# EAGLE board controller (EAGLE 6.2)
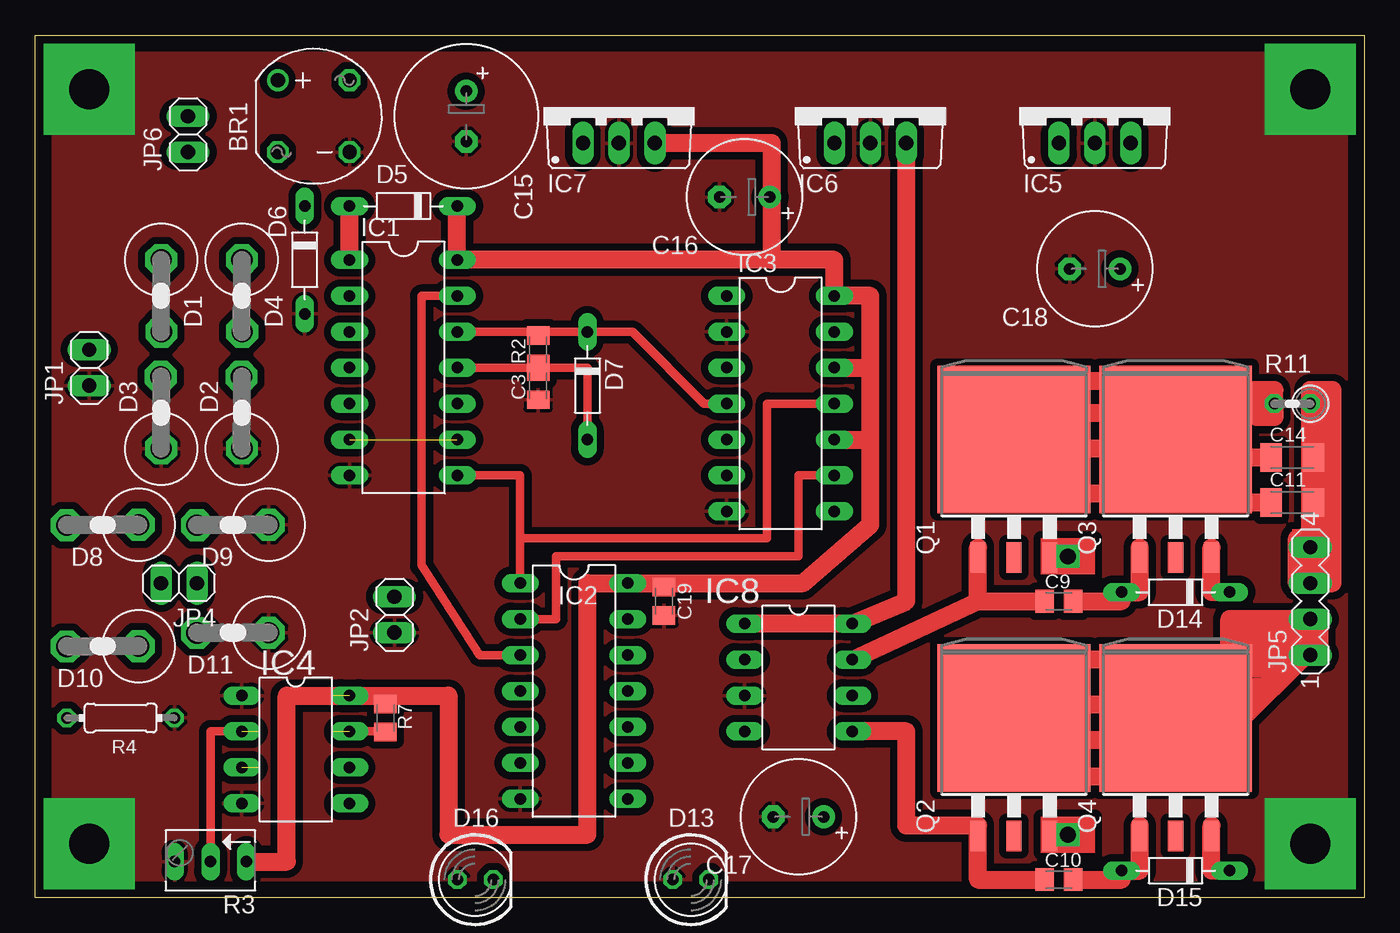
[diagram p0: board, top side]
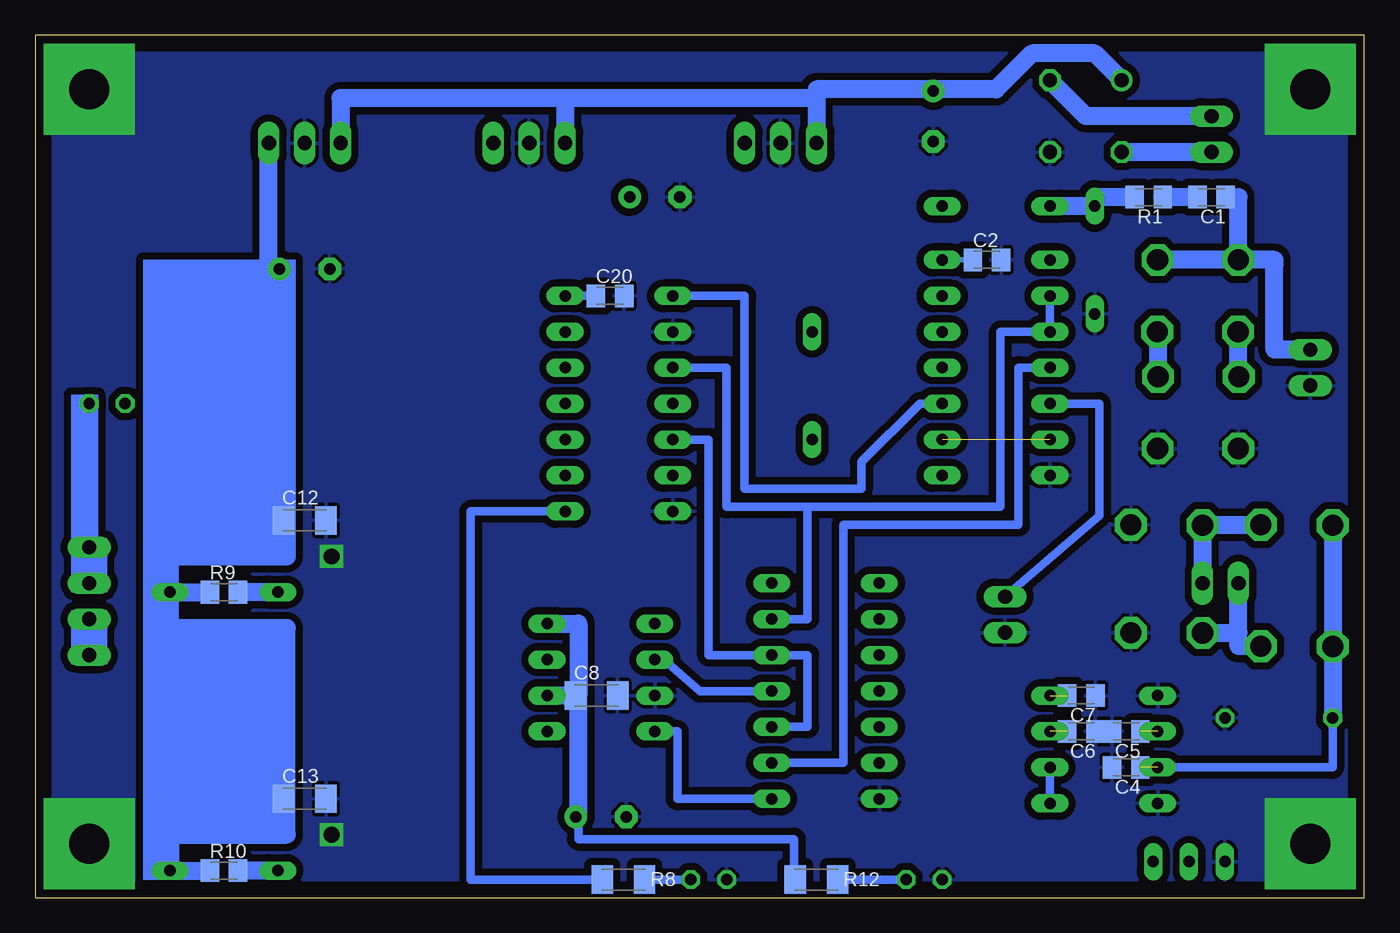
[diagram p1: board, bottom side, seen from below]

Size 93.98 x 60.96 mm. Coordinates in mm from the lower left corner, seen from the top.
Outline: 0,0 0,60.96 93.98,60.96 93.98,0 0,0
Copper layers (1*16): Top 0.035mm / dielectric 1.5mm / Bottom 0.035mm
Design rules: minimum track width 10mil, minimum drill 24mil, track to track 20mil, track to pad 25mil, pad to pad 25mil, via to via 20mil, smd to smd 0mil, copper to edge 10mil, drill to drill 8mil, minimum pad ring 10mil, minimum via ring 8mil, stop-mask expansion 6mil, vias tented up to drill 0mil, thermal gap 10mil

## Footprints (pad centres in the part's own frame; a part is rotated, then mirrored left to right if it is on the bottom)
RB1A = drill 1.016: + -2.54,2.54 | drill 1.016 octagon: - 2.54,-2.54; AC1 2.54,2.54; AC2 -2.54,-2.54
C0805K = smd 1.3 x 1.6: 1 -1,0; 2 1,0
C1206K = smd 1.5 x 2: 1 -1.5,0; 2 1.5,0
E3,5-10 = drill 0.813 pad 1.6: + -1.778,0 | drill 0.813 pad 1.6 octagon: - 1.778,0
E3,5-8 = drill 0.813 pad 1.6: + -1.778,0 | drill 0.813 pad 1.6 octagon: - 1.778,0
RAD5G = drill 1.499 octagon: A 2.54,0.025; C -2.54,0
D-7.5 = drill 0.813 long: A 3.81,0; C -3.81,0
LED5MM = drill 0.813 octagon: A -1.27,0; K 1.27,0
DIL14 = drill 0.813 long: 1 -7.62,-3.81; 2 -5.08,-3.81; 3 -2.54,-3.81; 4 0,-3.81; 5 2.54,-3.81; 6 5.08,-3.81; 7 7.62,-3.81; 8 7.62,3.81; 9 5.08,3.81; 10 2.54,3.81; 11 0,3.81; 12 -2.54,3.81; 13 -5.08,3.81; 14 -7.62,3.81
DIP08 = drill 0.813 long: 1 -3.81,-3.81; 2 -1.27,-3.81; 3 1.27,-3.81; 4 3.81,-3.81; 5 3.81,3.81; 6 1.27,3.81; 7 -1.27,3.81; 8 -3.81,3.81
TO220V = drill 1.016 long: 1 -2.54,-2.54; 2 0,-2.54; 3 2.54,-2.54
1X02 = drill 1.016 long: 1 -1.27,0; 2 1.27,0
MA04-1 = drill 1.016 long: 1 -3.81,0; 2 -1.27,0; 3 1.27,0; 4 3.81,0
TO263-3 = smd 1.067 x 2.159: 1 -2.54,-5.791; 2 0,-5.791; 3 2.54,-5.791 | smd 10.8 x 10.41: TAB 0,2.54
B64Y = drill 0.813 long: A 2.54,0; E -2.54,0; S 0,0
0204/7 = drill 0.813 octagon: 1 -3.81,0; 2 3.81,0
0207/2V = drill 0.813 octagon: 1 -1.27,0; 2 1.27,0

## Placement (x,y rotation side)
BR1  [RB1A]  19.68,55.24 0 top
C1  .1u  [C0805K]  10.79,49.53 180 bottom
C2  .1u  [C0805K]  26.67,45.09 0 bottom
C3  22n  [C0805K]  35.56,36.2 90 top
C4  1n  [C0805K]  16.83,9.21 180 bottom
C5  .1u  [C0805K]  16.83,11.75 180 bottom
C6  1n  [C0805K]  20,11.75 180 bottom
C7  .1u  [C0805K]  20,14.29 180 bottom
C8  .1u  [C1206K]  54.29,14.29 0 bottom
C9  .1u  [C0805K]  72.39,20.95 0 top
C10  .1u  [C0805K]  72.39,1.27 0 top
C11  10u  [C1206K]  88.9,27.94 0 top
C12  10u  [C1206K]  74.93,26.67 0 bottom
C13  10u  [C1206K]  74.93,6.99 0 bottom
C14  10u  [C1206K]  88.9,31.11 0 top
C15  100u  [E3,5-10]  30.48,55.24 270 top
C16  330u  [E3,5-8]  50.16,49.53 180 top
C17  330u  [E3,5-8]  53.98,5.71 180 top
C18  330u  [E3,5-8]  74.93,44.45 180 top
C19  .1u  [C0805K]  44.45,20.95 90 top
C20  .1u  [C0805K]  53.34,42.55 0 bottom
D1  1n5819  [RAD5G]  8.89,42.55 270 top
D2  1n5819  [RAD5G]  14.61,34.29 90 top
D3  1n5337B  [RAD5G]  8.89,34.29 90 top
D4  1n5337B  [RAD5G]  14.61,42.55 270 top
D5  1n4148  [D-7.5]  26.04,48.9 180 top
D6  1n4148  [D-7.5]  19.05,45.09 270 top
D7  1n4148  [D-7.5]  39.05,36.2 270 top
D8  1n5819  [RAD5G]  4.76,26.35 180 top
D9  1n5819  [RAD5G]  13.97,26.35 180 top
D10  1n5819  [RAD5G]  4.76,17.78 180 top
D11  1n5819  [RAD5G]  13.97,18.73 180 top
D13  [LED5MM]  46.35,1.27 0 top
D14  1n4148  [D-7.5]  80.64,21.59 180 top
D15  1n4148  [D-7.5]  80.64,1.91 180 top
D16  [LED5MM]  31.11,1.27 0 top
IC1  74HC14  [DIL14]  26.04,37.47 270 top
IC2  74HC08  [DIL14]  38.1,14.61 270 top
IC3  74HC74  [DIL14]  52.7,34.92 270 top
IC4  LM311n  [DIP08]  18.41,10.48 270 top
IC5  7824T  [TO220V]  74.93,55.88 0 top
IC6  7809T  [TO220V]  59.05,55.88 0 top
IC7  7805T  [TO220V]  41.27,55.88 0 top
IC8  UCC27423  [DIP08]  53.98,15.56 270 top
JP1  [1X02]  3.81,37.47 90 top
JP2  [1X02]  25.4,20 90 top
JP4  [1X02]  10.16,22.23 180 top
JP5  [MA04-1]  90.17,20.95 90 top
JP6  [1X02]  10.79,53.98 90 top
Q1  STB16NF06  [TO263-3]  69.22,29.84 0 top
Q2  STB16NF06  [TO263-3]  69.22,10.16 0 top
Q3  STB16PF06  [TO263-3]  80.64,29.84 0 top
Q4  STB16PF06  [TO263-3]  80.64,10.16 0 top
R1  1k  [C0805K]  15.24,49.53 180 bottom
R2  20k  [C0805K]  35.56,38.73 90 top
R3  10k  [B64Y]  12.38,2.54 180 top
R4  10R  [0204/7]  6.03,12.7 0 top
R7  1k  [C0805K]  24.77,12.7 270 top
R8  470  [C1206K]  52.39,1.27 0 bottom
R9  1k  [C0805K]  80.64,21.59 0 bottom
R10  1k  [C0805K]  80.64,1.91 0 bottom
R11  10R  [0207/2V]  88.9,34.92 180 top
R12  1k  [C1206K]  38.73,1.27 0 bottom

## Library data of the parts
BR1 = rectifier
C1-C20 R1 R2 R4 R7-R12 = rcl
D1-D11 D14 D15 = diode
D13 D16 = led
IC1-IC3 = 40xx
IC4 IC8 = motorola-sensor-driver
IC5-IC7 = transistor-pnp
JP1 JP2 JP4 JP6 = pinhead
JP5 = con-lstb
Q1-Q4 = linear
R3 = pot

## Nets
+5: C7.2 D5.C IC2.14 IC3.10 IC3.12 IC3.14 IC4.8 IC7.3 R3.E
+9V: IC6.3 IC8.1 IC8.6 IC8.8
+24: D14.C D15.C IC5.3
GND: BR1.- C2.2 C3.1 C4.2 C5.2 C6.1 C7.1 C8.2 C12.2 C13.2 C15.- C16.- C17.- C18.- C19.1 C20.2 D2.C D3.C D6.A D9.C D11.C D13.A D16.A IC1.7 IC2.7 IC3.2 IC3.7 IC4.1 IC4.4 IC5.2 IC6.2 IC7.2 IC8.3 JP1.1 JP2.1 R3.A R4.2
S$1: D14.A
S$3: IC8.7
S$4: D5.A
S$5: D15.A
S$6: IC8.5
S$7: IC2.13 IC3.3
S$8: C4.1 IC4.3 R4.1
S$9: R11.2
S$12: JP5.3 JP5.4 R11.1
S$13: JP5.1 JP5.2
S$14: IC2.10 IC2.12 IC3.5
S$16: IC1.14
S$17: IC2.9
S$18: IC2.11 IC8.2
S$19: IC2.8 IC8.4
S$20: D8.C JP4.1
S$21: IC2.2 IC3.9
S$22: D7.C IC3.4
S$23: IC1.13 IC2.3
S$24: D7.A
S$25: IC3.1
S$26: D10.C JP4.2
S$27: D1.C D4.C
S$29: D6.C
S$30: BR1.AC2 JP6.1
S$31: IC2.1 IC3.11
S$33: C6.2 IC4.7
S$34: IC1.5 JP2.2
S$35: IC4.5 IC4.6
S$36: C5.1 IC4.2 R3.S
S$37: BR1.AC1 JP6.2
S$38: IC1.6 IC1.9
S$40: JP1.2
S$43: BR1.+ IC5.1 IC6.1 IC7.1
S$45: D13.K
S$46: IC3.8

## Tracks (layer width: path | path; a pad name or v marks a point on that pad's centre or on a via)
+5  (1 unrouted)
  Top 1.27: D5.C 29.84,45.09 52.07,45.09 | 52.07,45.09 56.52,45.09 IC3.14 59.05,42.55 59.05,37.47 | 59.05,32.38 59.05,26.35 54.29,22.23 IC2.14 39.05,22.23 39.05,4.45 29.21,4.45 29.21,14.29 IC4.8 17.78,14.29 17.78,2.54 R3.E | 59.05,32.38 59.05,37.47 | IC7.3 52.07,53.34 52.07,45.09 | IC3.10 59.05,32.38 | IC3.12 59.05,37.47
  Bottom 0.61: 54.29,42.55 IC3.14
+9V
  Top 1.27: IC8.1 IC8.8 61.59,20.95 IC6.3
  Bottom 0.61: 55.56,5.71 55.56,4.13 40.32,4.13 40.32,1.27
  Bottom 1.27: IC8.8 55.56,19.37 55.56,14.29 | 55.56,14.29 IC8.6 | 55.56,5.71 55.56,14.29
+24
  Top 1.27: D14.C 83.19,21.59 83.19,24.77 | 83.19,5.08 83.19,1.91 D15.C
  Bottom 1.27: 77.47,45.09 77.47,44.45 | 77.47,45.09 IC5.3 | D14.C 81.92,21.59 | D14.C 84.45,24.13 76.2,24.13 76.2,40.01 77.47,45.09 | D14.C 84.45,19.05 76.2,19.05 76.2,4.45 84.45,4.45 D15.C 81.92,1.91
GND  (via drill 1.1, 2.8 pad 6.45)
  Bottom 0.406: 19.05,11.75 18.41,11.75
  other vias: 90.17,3.81 3.81,3.81 3.81,57.15 73.03,4.45 73.03,24.13 90.17,57.15
  pour Top: 1.27,59.69 92.71,59.69 92.71,1.27 1.27,1.27
  pour Bottom: 92.71,1.27 1.27,1.27 1.27,59.69 92.71,59.69
S$1
  Top 1.27: 78.11,24.77 78.11,21.59 D14.A 76.83,20.95 73.66,20.95
  Bottom 1.27: D14.A 79.38,21.59
S$2
  Top 1.27: 73.34,8.57 76.52,8.57 76.52,11.11 73.03,11.11 73.03,13.65 76.83,13.65 76.83,16.83 73.34,16.83
S$3
  Top 1.27: 66.67,20.95 71.12,20.95 | 66.67,20.95 66.67,24.77 | IC8.7 66.67,20.95
S$4
  Top 1.27: 22.23,45.09 D5.A
  Bottom 1.27: 19.37,48.9 D5.A
S$5
  Top 1.27: 78.11,5.08 78.11,1.91 D15.A 76.83,1.27 73.66,1.27
  Bottom 1.27: D15.A 79.38,1.91
S$6
  Top 1.27: 71.12,1.27 66.67,1.27 66.67,5.08 61.59,5.08 61.59,11.75 IC8.5
S$7
  Bottom 0.61: 39.37,27.62 39.37,19.68 IC2.13 | 39.37,27.62 25.72,27.62 25.72,40.01 22.23,40.01 22.23,42.55 | 39.37,27.62 45.09,27.62 45.09,37.47 IC3.3
S$8  (1 unrouted)
  Bottom 0.61: R4.1 2.22,9.21 IC4.3
  Bottom 1.27: 2.22,26.35 R4.1
S$9
  Top 1.27: 83.82,34.92 R11.2 | R11.2 87.63,35.88 86.04,35.88 | R11.2 87.63,33.97 86.36,33.97
S$10
  Top 1.27: 84.45,31.11 87,31.11
S$11
  Top 1.27: 84.45,27.94 87,27.94
S$12
  Top 1.27: JP5.3 90.17,25.4 | 90.17,25.4 R11.1 90.17,35.88 91.76,35.88 91.76,22.23 JP5.3 | JP5.3 89.22,22.23 89.22,25.4 90.17,25.4
  Bottom 1.27: JP5.3 JP5.4
S$13
  Top 1.27: 89.85,17.14 JP5.1 JP5.2 84.45,19.68 84.45,17.14 | 89.85,17.14 85.09,17.14 | 89.85,17.14 85.09,12.38 85.09,14.92 87,14.92 87.95,16.19 85.72,16.19
  Bottom 1.27: JP5.1 JP5.2
S$14
  Bottom 0.61: IC3.5 46.35,32.38 46.35,17.14 IC2.12 39.37,17.14 39.37,12.06 IC2.10
S$15
  Bottom 1.27: 8.89,45.4 8.89,49.53
S$16
  Bottom 0.406: 27.62,45.09 IC1.14
S$17
  Bottom 0.61: IC2.9 36.83,9.53 36.83,26.35 24.45,26.35 24.45,37.47 22.23,37.47
S$18
  Bottom 0.61: IC2.11 46.99,14.61 49.53,16.83 IC8.2
S$19
  Bottom 0.61: IC2.8 48.58,6.99 48.58,11.75 IC8.4
S$20
  Bottom 1.27: JP4.1 11.43,26.35 D8.C
S$21
  Top 0.61: IC3.9 53.98,29.84 53.98,24.13 36.83,24.13 36.83,19.68 IC2.2
S$22
  Top 0.61: 29.84,40.01 D7.C 42.23,40.01 47.31,34.92 IC3.4
S$23
  Top 0.61: IC1.13 27.3,42.55 27.3,23.5 31.43,17.14 IC2.3
S$24
  Top 0.61: 29.84,37.47 39.05,37.47 D7.A
S$25
  Bottom 0.61: IC3.1 43.81,42.55 43.81,28.89 35.56,28.89 35.56,30.8 31.43,34.92 29.84,34.92
S$26
  Bottom 1.27: 8.89,18.73 JP4.2 | 11.43,18.73 8.89,18.73 | 8.89,18.73 8.89,17.78 D10.C
S$27
  Bottom 1.27: 6.35,45.09 D1.C D4.C
S$28
  Bottom 1.27: 11.75,49.53 14.29,49.53
S$29
  Bottom 1.27: 16.19,49.53 19.05,49.53 D6.C
S$30
  Bottom 1.27: JP6.1 BR1.AC2
S$31
  Top 0.61: 34.29,25.4 51.75,25.4 51.75,34.92 IC3.11 | 29.84,29.84 34.29,29.84 34.29,25.4 | 34.29,25.4 IC2.1
S$32
  Bottom 1.27: 8.89,36.83 8.89,40.01
S$33  (1 unrouted)
  Top 0.61: 24.77,11.75 IC4.7
S$34
  Bottom 0.61: IC1.5 18.73,34.92 18.73,26.99 JP2.2
S$35
  Bottom 0.61: IC4.5 IC4.6
S$36  (1 unrouted)
  Top 0.61: R3.S 12.38,11.75 IC4.2
S$37
  Bottom 1.27: JP6.2 19.68,55.24 BR1.AC1
S$38  (1 unrouted)
S$40
  Bottom 1.27: JP1.2 6.35,38.73 6.35,44.77
S$41
  Bottom 0.61: 37.15,1.27 32.38,1.27
S$43
  Bottom 1.27: BR1.+ 19.05,59.69 23.5,59.69 26.04,57.15 38.73,57.15 38.73,56.52 | 38.73,56.52 IC7.1 | 38.73,56.52 56.52,56.52 | 56.52,56.52 IC6.1 | 56.52,56.52 72.39,56.52 IC5.1
S$45
  Bottom 0.61: 50.8,1.27 D13.K
S$46
  Bottom 0.61: IC3.8 63.18,27.3 63.18,1.27 53.98,1.27
S$47
  Top 1.27: 72.71,28.57 76.83,28.57 76.83,31.75 73.34,31.75 73.34,34.29 77.15,34.29 77.15,36.51 72.39,36.51
S$48
  Bottom 1.27: 14.61,40.01 14.61,36.83
(copper drawn outside any net)
  shapes: Bottom area x6, Top area x5